# Altium PCB BAT_18650X2.PcbDoc
Units mil, origin at the board's own origin, x right, y up, seen from the top; angles counter-clockwise.
Board outline 3464.57 x 2206.41 mil, 2 copper layers (Top Layer, Bottom Layer); 10 components, 9 nets, 75 pads, 86 vias.
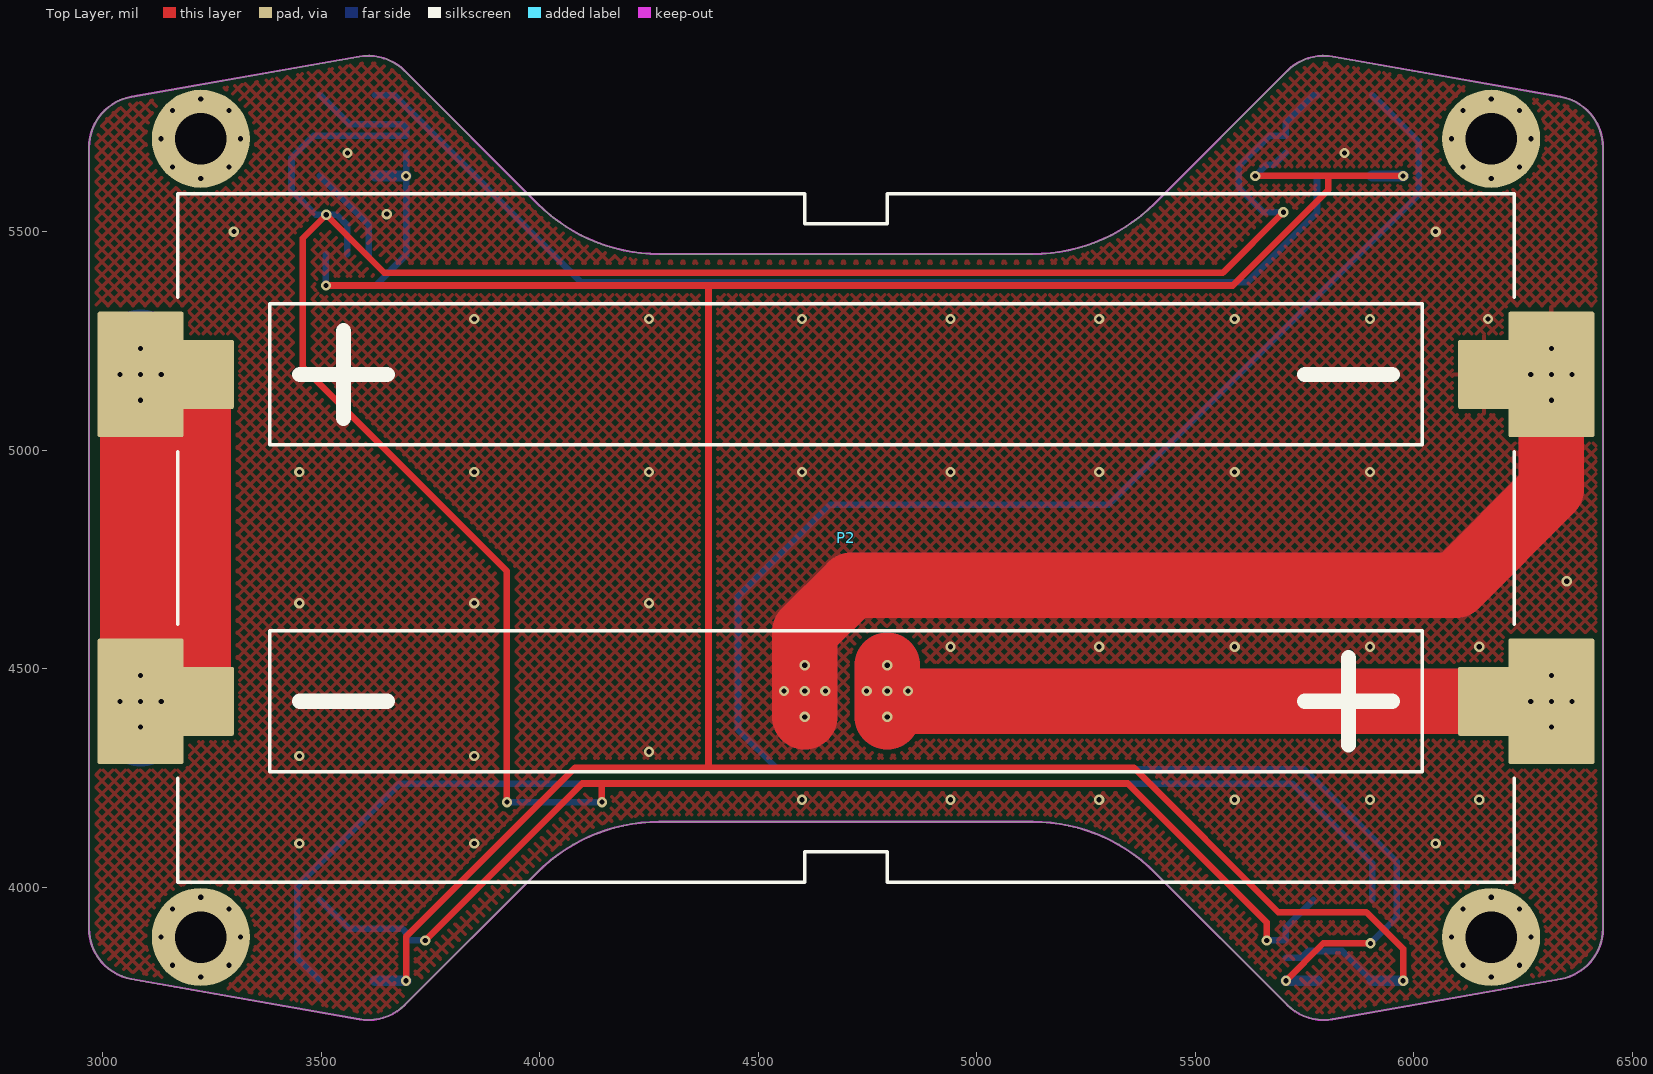
[diagram p0: Top Layer view]
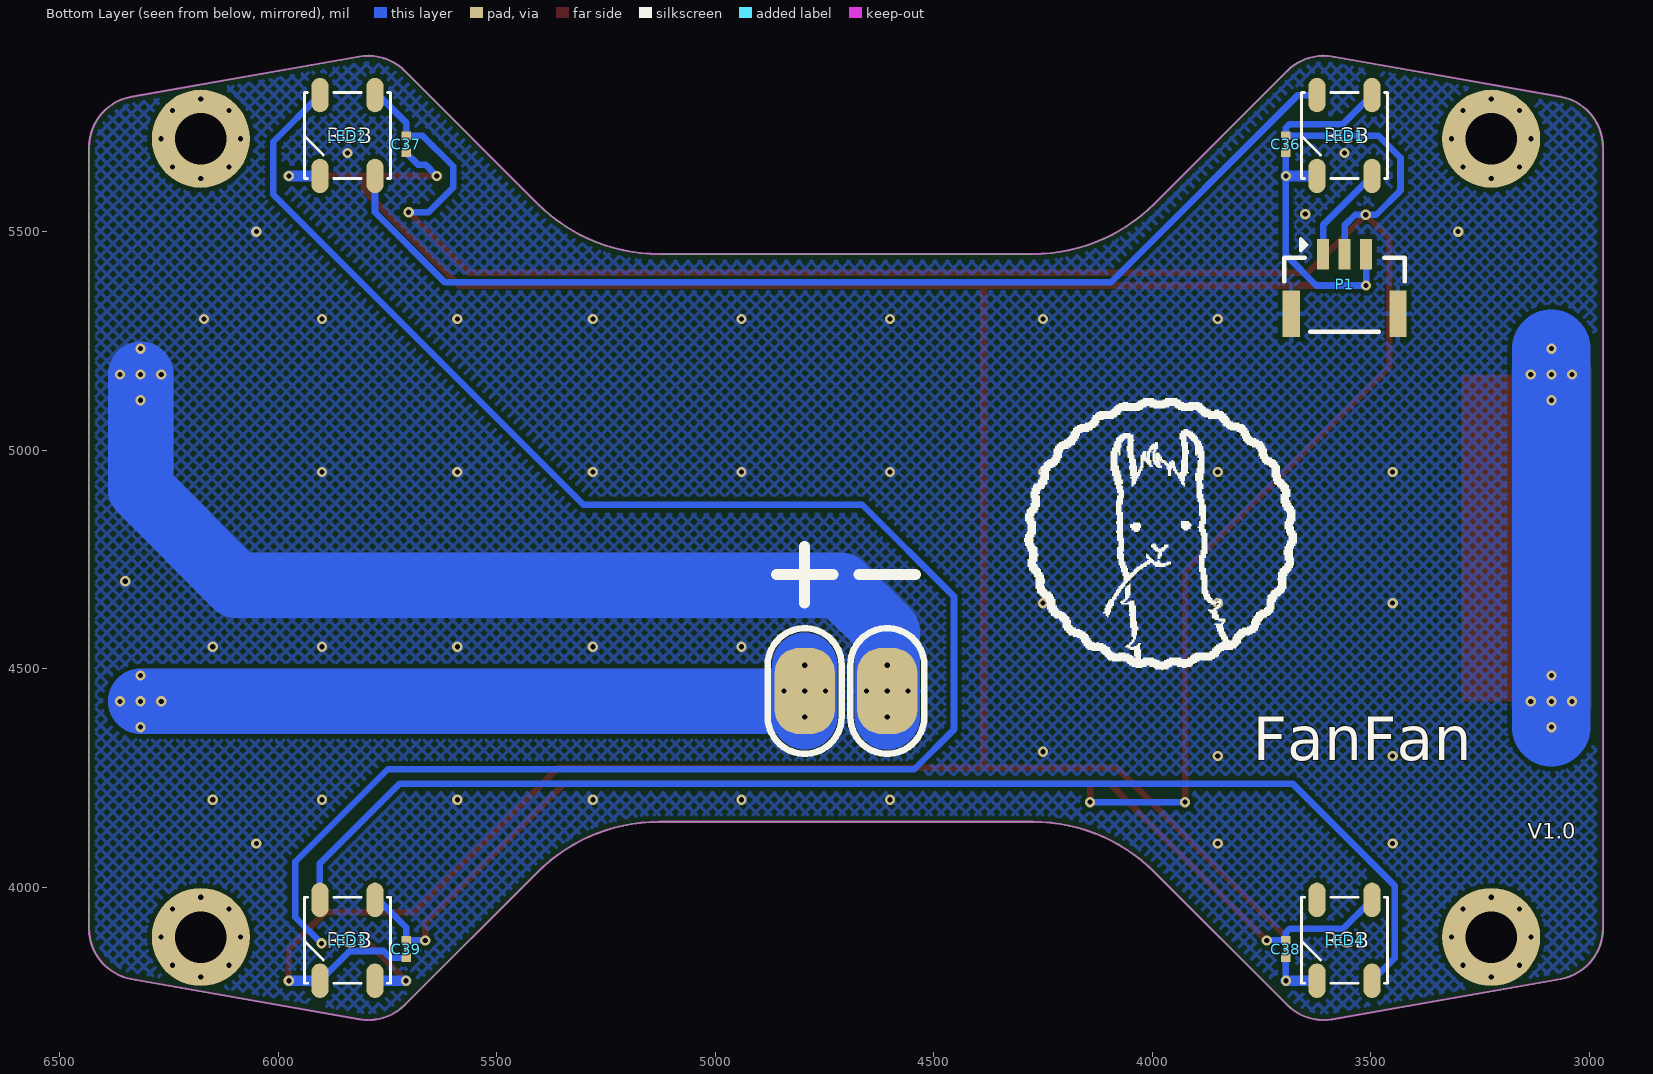
[diagram p1: Bottom Layer view, seen from below]

## Layer stack, top to bottom
Top Layer: signal copper 1.4
Dielectric: core 12.6, FR-4, Dk 4.8
Bottom Layer: signal copper 1.4

## Board outline
3066.11,3789.67 3587.19,3697.79 ccw(c3607.7,3814.1) 3691.22,3730.59 3994.93,4034.3 cw(c4273.31,3755.91) 4273.31,4149.61 5128.26,4149.61 cw(c5128.26,3755.91) 5406.65,4034.3 5710.36,3730.59 ccw(c5793.88,3814.1) 5814.39,3697.79 6335.47,3789.67 ccw(c6314.96,3905.99) 6433.07,3905.99 6433.07,5692.44 ccw(c6314.96,5692.44) 6335.47,5808.76 5814.39,5900.64 ccw(c5793.88,5784.33) 5710.36,5867.84 5406.65,5564.13 cw(c5128.26,5842.52) 5128.26,5448.82 4273.31,5448.82 cw(c4273.31,5842.52) 3994.93,5564.13 3691.22,5867.84 ccw(c3607.7,5784.33) 3587.19,5900.64 3066.11,5808.76 ccw(c3086.62,5692.44) 2968.51,5692.44 2968.51,3905.99 ccw(c3086.62,3905.99)

## Design rules (kind name [scope] priority, off if disabled: settings)
Clearance [All] p1: gap=10
ComponentClearance [All] p1: gap=0 collisioncheckmode=3 verticalgap=0 showdistances=FALSE
HoleSize [All] p1: absolutevalues=TRUE maxlimit=300 minlimit=1 maxpercent=80.000 minpercent=20.000
HoleToHoleClearance [All] p1: gap=6 allowstackedmicrovias=TRUE
MinimumSolderMaskSliver [All] p1: minsoldermaskwidth=0
PolygonConnect Via [IsVia] p1: connectstyle=Direct reliefconductorwidth=10 reliefentries=4 polygonreliefangle="90 Angle"
PolygonConnect [All] p2: connectstyle=Relief reliefconductorwidth=10 reliefentries=4 polygonreliefangle="90 Angle"
RoutingVias [All] p1: holewidth=11.81 width=23.62 viastyle="Through Hole" minholewidth=7.87 minwidth=15.75 maxholewidth=146.11 maxwidth=404.33
SilkToSilkClearance [All] p1: silktosilkclearance=0
SilkscreenOverComponentPads [All] p1: minsilkscreentomaskgap=0
SolderMaskExpansion [All] p1: expansion=4
Width [All] p1: maxlimit=300 minlimit=8 preferedwidth=10
22 further rules are at their usual default settings.

## Components (designator, comment, footprint, x,y, rotation, side; value= is the part's Value field where it differs from the comment)
C36 "100nF" 0402_C 3694.14,5700 r90 bottom locked
C37 "100nF" 0402_C 5707.44,5700 r90 bottom
C38 "100nF" 0402_C 3694.14,3858.43 r90 bottom
C39 "100nF" 0402_C 5707.44,3858.43 r90 bottom
LED1 "WS2812_5050_RGB" RGB_50X50 3560,5720 r180 bottom locked
LED2 "WS2812_5050_RGB" RGB_50X50 5841.58,5720 r180 bottom locked (schematic designator LED1)
LED3 "WS2812_5050_RGB" RGB_50X50 5841.58,3878.43 r180 bottom locked
LED4 "WS2812_5050_RGB" RGB_50X50 3560,3878.43 r180 bottom locked
P1 "CON" BM03B-GHS-TBT(TOP) 3560,5380 r0 bottom (schematic designator P12)
P2 "CON" 18650X2 4700.79,4799.22 r180 top locked

## Footprints (in the part's own frame and the unit in brackets; to place one, negate y for a bottom-side part, rotate by r counter-clockwise, add the part's x,y. Pads: shape width x height; smd on the part's side, far side on the other; paste and mask are expansions set on the pad)
0402_C [mm]
  rect 0.5x0.55 smd: 1(-0.5,0) 2(0.5,0)
  silkscreen extent -0.1,-0.1 0.1,0.1
18650X2 [mm]
  rrect5% 5x7.3 smd: 1(-41,-9.5) 2(41,-9.5) 3(41,9.5) 4(-41,9.5)
  rrect5% 3x4 smd: 1(-37.084,-9.5) 2(37.084,-9.5) 3(37.084,9.5) 4(-37.084,9.5)
  silkscreen extent -38.85,-20 38.85,20
BM03B-GHS-TBT(TOP) [mm]
  rect 0.7x1.778 smd: 1(1.25,-1.725) 2(0,-1.725) 3(-1.25,-1.725)
  rect 1x2.7 smd: 4(-3.1,1.725) 5(3.1,1.725)
  silkscreen extent -3.5,-2.64 3.5,2.77
RGB_50X50 [mm]
  oval 1x2 smd: 1(-1.6,-2.35) 2(1.6,-2.35) 3(1.6,2.35) 4(-1.6,2.35)
  silkscreen extent -2.5,-2.5 2.5,2.5

## Part data
C36 C37 C38 C39: library part Cap, "Capacitor"
P1: library part CON-3
P2: library part CON-4

## Free pads (board coordinates)
  round 224.41 hole 118.11: 0(3224.41,3885.83) 0(3224.41,5712.6) 0(6177.17,3885.83) 0(6177.17,5712.6)
  round 23.62 hole 11.81: 0(3224.41,3794.73) 0(3224.41,5803.7) 0(6177.17,3794.73) 0(6177.17,5803.7) 1(3159.99,3821.41) 1(3159.99,5777.02) 1(6241.59,3821.41) 1(6241.59,5777.02) 2(3133.31,3885.83) 2(3133.31,5712.6) 2(6268.27,3885.83) 2(6268.27,5712.6) 3(3159.99,3950.25) 3(3159.99,5648.18) 3(6241.59,3950.25) 3(6241.59,5648.18) 4(3224.41,3976.93) 4(3224.41,5621.5) 4(6177.17,3976.93) 4(6177.17,5621.5) 5(3288.83,3950.25) 5(3288.83,5648.18) 5(6112.75,3950.25) 5(6112.75,5648.18) 6(3315.51,3885.83) 6(3315.51,5712.6) 6(6086.06,3885.83) 6(6086.06,5712.6) 7(3288.83,3821.41) 7(3288.83,5777.02) 7(6112.75,3821.41) 7(6112.75,5777.02)
  rrect80% 137.8x196.85 smd far side: 0(4606.3,4448.82) 0(4795.28,4448.82)

## Via types
v1: diameter 23.62, hole 11.81, Top Layer to Bottom Layer, tented both sides, 86 vias

## Nets (pads, with @x,y where several pads share a name; then routed paths per layer and width w, separated by ;. In a path a pad name is that pad's centre, name@x,y a point inside that pad or via, vN(x,y) a via of type N, cw(c..) or ccw(c..) an arc to the next point about the centre after c; other vN are vias at no path point)
BAT: P2.4 pad.0@4795.28,4448.82 | length 3204.7
  Top Layer w150: v1(4795.28,4389.76) v1(4795.28,4507.87) ; 4830.71,4425.2 v1(6314.96,4425.2)
  Bottom Layer w150: v1(4795.28,4389.76) v1(4795.28,4507.87) ; pad.0@4830.71,4425.2 v1(6314.96,4425.2)
  other v1: 6314.96,4366.14 6267.72,4425.2 6362.2,4425.2 4748.04,4448.82 4795.28,4448.82 4842.52,4448.82 6314.96,4484.25
GND: P1.4 P1.5 P2.1 pad.0@4606.3,4448.82 | length 4720.2
  Top Layer w150: v1(4606.3,4389.76) v1(4606.3,4507.87) 4606.3,4584.24 4713.38,4691.32 6095.86,4691.32 6314.96,4910.42 v1(6314.96,5173.23)
  Bottom Layer w150: v1(6314.96,5173.23) 6314.96,4910.42 6095.86,4691.32 4713.38,4691.32 4606.3,4584.24 v1(4606.3,4507.87) ; v1(4606.3,4507.87) v1(4606.3,4389.76) v1(4606.3,4507.87)
  other v1: 3450,4100 3850,4100 6050,4100 4600,4200 4940,4200 5280,4200 5590,4200 5900,4200 6150,4200 3450,4300 3850,4300 4250,4310 4559.06,4448.82 4606.3,4448.82 4653.54,4448.82 4940,4550 5280,4550 5590,4550 5900,4550 6150,4550 3450,4650 3850,4650 4250,4650 6350,4700 3450,4950 3850,4950 4250,4950 4600,4950 4940,4950 5280,4950 5590,4950 5900,4950 6314.96,5114.18 6267.72,5173.23 6362.2,5173.23 6314.96,5232.29 3850,5300 4250,5300 4600,5300 4940,5300 5280,5300 5590,5300 5900,5300 6170,5300 3300,5500 6050,5500 3650,5540 3560,5680 5841.58,5680
NetLED1_4: LED1.4 LED2.2 | length 2482.8
  Bottom Layer w15: LED1.4 3666.47,5812.52 4095.18,5383.81 5618.12,5383.81 5778.59,5544.27 LED2.2
NetLED2_4: LED2.4 LED3.2 | length 4658.9
  Top Layer w15: v1(5707.44,3785.91) 5792.96,3871.43 v1(5900.9,3871.43)
  Bottom Layer w15: v1(5900.9,3871.43) 5960.84,3931.37 5960.84,4058.32 5749.28,4269.88 4544.76,4269.88 4453.65,4360.99 4453.65,4665.21 4663.67,4875.23 5301.44,4875.23 6011.32,5585.1 6011.32,5705.77 LED2.4
  Bottom Layer w25: v1(5707.44,3785.91) LED3.2
NetLED3_4: LED3.4 LED4.2 | length 2954
  Bottom Layer w15: LED4.2 3445.57,3837.34 3445.57,4003.72 3678.92,4237.06 5722.11,4237.06 5904.57,4054.6 LED3.4
NetP2_2: P2.2 P2.3 | length 1614.2
  Top Layer w185: v1(3086.62,4425.2) v1(3086.62,5173.23)
  Bottom Layer w180: v1(3086.62,4366.14) v1(3086.62,5232.29)
  other v1: 3039.37,4425.2 3133.86,4425.2 3086.62,4484.25 3086.62,5114.18 3039.37,5173.23 3133.86,5173.23
VCC_5.0V: C36.2 C37.2 C38.2 C39.2 LED1.3 LED2.3 LED3.3 LED4.3 P1.2 | length 8092.4
  Top Layer w15: v1(3738.11,3878.11) 4097.24,4237.24 4142.34,4237.24 ; v1(3924.92,4194.65) 3924.92,4722.94 3457.57,5190.29 3457.57,5484.73 v1(3511.57,5538.72) 3644.28,5406 5563.34,5406 v1(5701.58,5544.24) ; v1(4142.34,4194.65) 4142.34,4237.24 ; v1(5663.46,3878.11) 5663.46,3919.39 5345.62,4237.24 4142.34,4237.24
  Bottom Layer w15: LED4.3 3563.29,3904.67 3685.81,3904.67 3694.14,3896.34 C38.2 v1(3738.11,3878.11) ; LED1.3 3563.29,5746.24 3685.81,5746.24 3694.14,5737.91 C36.2 3482.51,5719.69 3431.97,5669.14 3431.97,5594.27 3487.51,5538.72 3535.49,5538.72 3560,5514.21 P1.2 ; v1(3924.92,4194.65) v1(4142.34,4194.65) ; v1(5663.46,3878.11) C39.2 5707.44,3908.12 LED3.3@5770.26,3970.95 ; v1(5701.58,5544.24) 5656.24,5544.24 5599.48,5600.99 5599.48,5649.48 5669.69,5719.69 C37.2 5707.44,5749.69 5770.26,5812.52 LED2.3
WS2812_GND: C36.1 C37.1 C38.1 C39.1 LED1.1 LED2.1 LED3.1 LED4.1 P1.3 | length 7825.1
  Top Layer w15: v1(3510.79,5376.76) 5585.54,5376.76 5804.78,5596.01 5804.78,5627.48 ; v1(3694.14,3785.91) 3694.14,3886.33 4081.44,4273.63 4386.1,4273.63 ; 4390.82,5376.76 4386.1,5372.04 4386.1,4273.63 ; v1(5637.38,5627.48) v1(5975.72,5627.48) ; v1(5975.72,3785.91) 5975.72,3858.77 5891.74,3942.75 5689.87,3942.75 5358.99,4273.63 4386.1,4273.63
  Bottom Layer w15: P1.3 v1(3510.79,5376.76) 3624.51,5376.76 3694.14,5446.4 v1(3694.14,5627.48) C36.1 ; v1(3694.14,3785.91) C38.1 ; v1(5637.38,5627.48) 5663.26,5653.36 5680.48,5653.36 C37.1 ; C39.1 5743.13,3838.74 5758.34,3853.96 5836.52,3853.96 LED3.1
  Bottom Layer w25: LED4.1 v1(3694.14,3785.91) ; LED1.1 v1(3694.14,5627.48) ; LED3.1 v1(5975.72,3785.91) ; LED2.1 v1(5975.72,5627.48)
WS2812_PWM: LED1.2 P1.1 | length 247
  Bottom Layer w15: LED1.2 3609.21,5515.28 P1.1 P1.1@3609.21,5468.89
pads on no net: LED4.4

## Polygon pours and split planes (outlines as drawn)
GND on Bottom Layer "Bottom Layer-No Net" (hatched 45Degree grid 20 track 8, remove dead copper, pour order 1000): 2970,3700 2970,5900 6440,5900 6430,5890 6430,3700 2970,3700
GND on Top Layer "Bottom Layer-No Net" (hatched 45Degree grid 20 track 8, remove dead copper, pour order 1001): 2970,3700 2970,5900 6440,5900 6430,5890 6430,3700 2970,3700

## Keep-outs
Keep-Out Layer:
  the board outline again, w5

## Other copper
Top Layer:
  rectangle net NetP2_2: 3086.62,4425.2 3293.85,5173.23

## Silkscreen, mask and mechanical layers (free items; w line width, h text height)
Bottom Overlay:
  drawing of 1008 lines, arcs and shapes, not listed
  text "FanFan" at 3770,4290 h100
  text "V1.0" at 3140.31,4111.34 h35

## Text inside footprints (layer, text, board x,y; h text height)
LED1: Bottom Overlay "RGB" at 3607,5702.5 h35
LED2: Bottom Overlay "RGB" at 5888.58,5702.5 h35
LED3: Bottom Overlay "RGB" at 5888.58,3860.93 h35
LED4: Bottom Overlay "RGB" at 3607,3860.93 h35